# Altium PCB EW-02-PCBDesign.PcbDoc
Units mm, origin at the board's own origin, x right, y up, seen from the top; angles counter-clockwise.
Board outline 152.4 x 101.6 mm, 2 copper layers (Top Layer, Bottom Layer); 16 components, 15 nets, 101 pads, 0 vias.
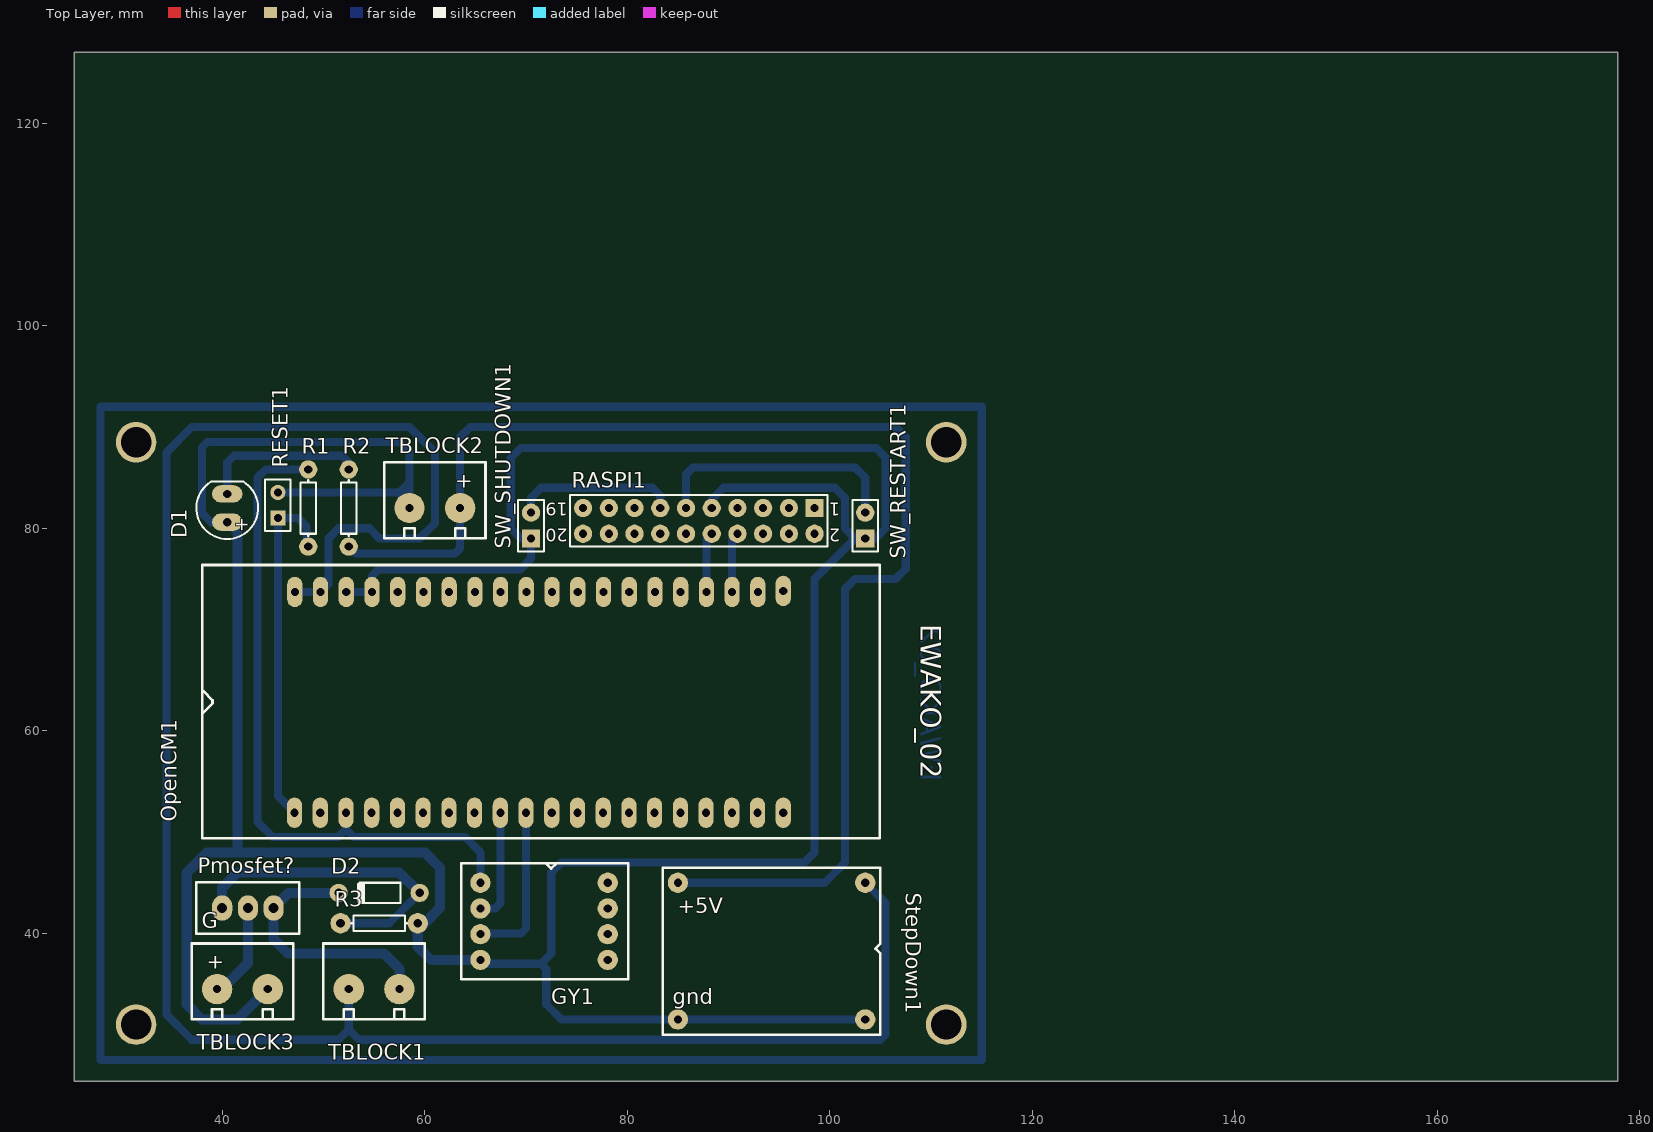
[diagram p0: Top Layer view]
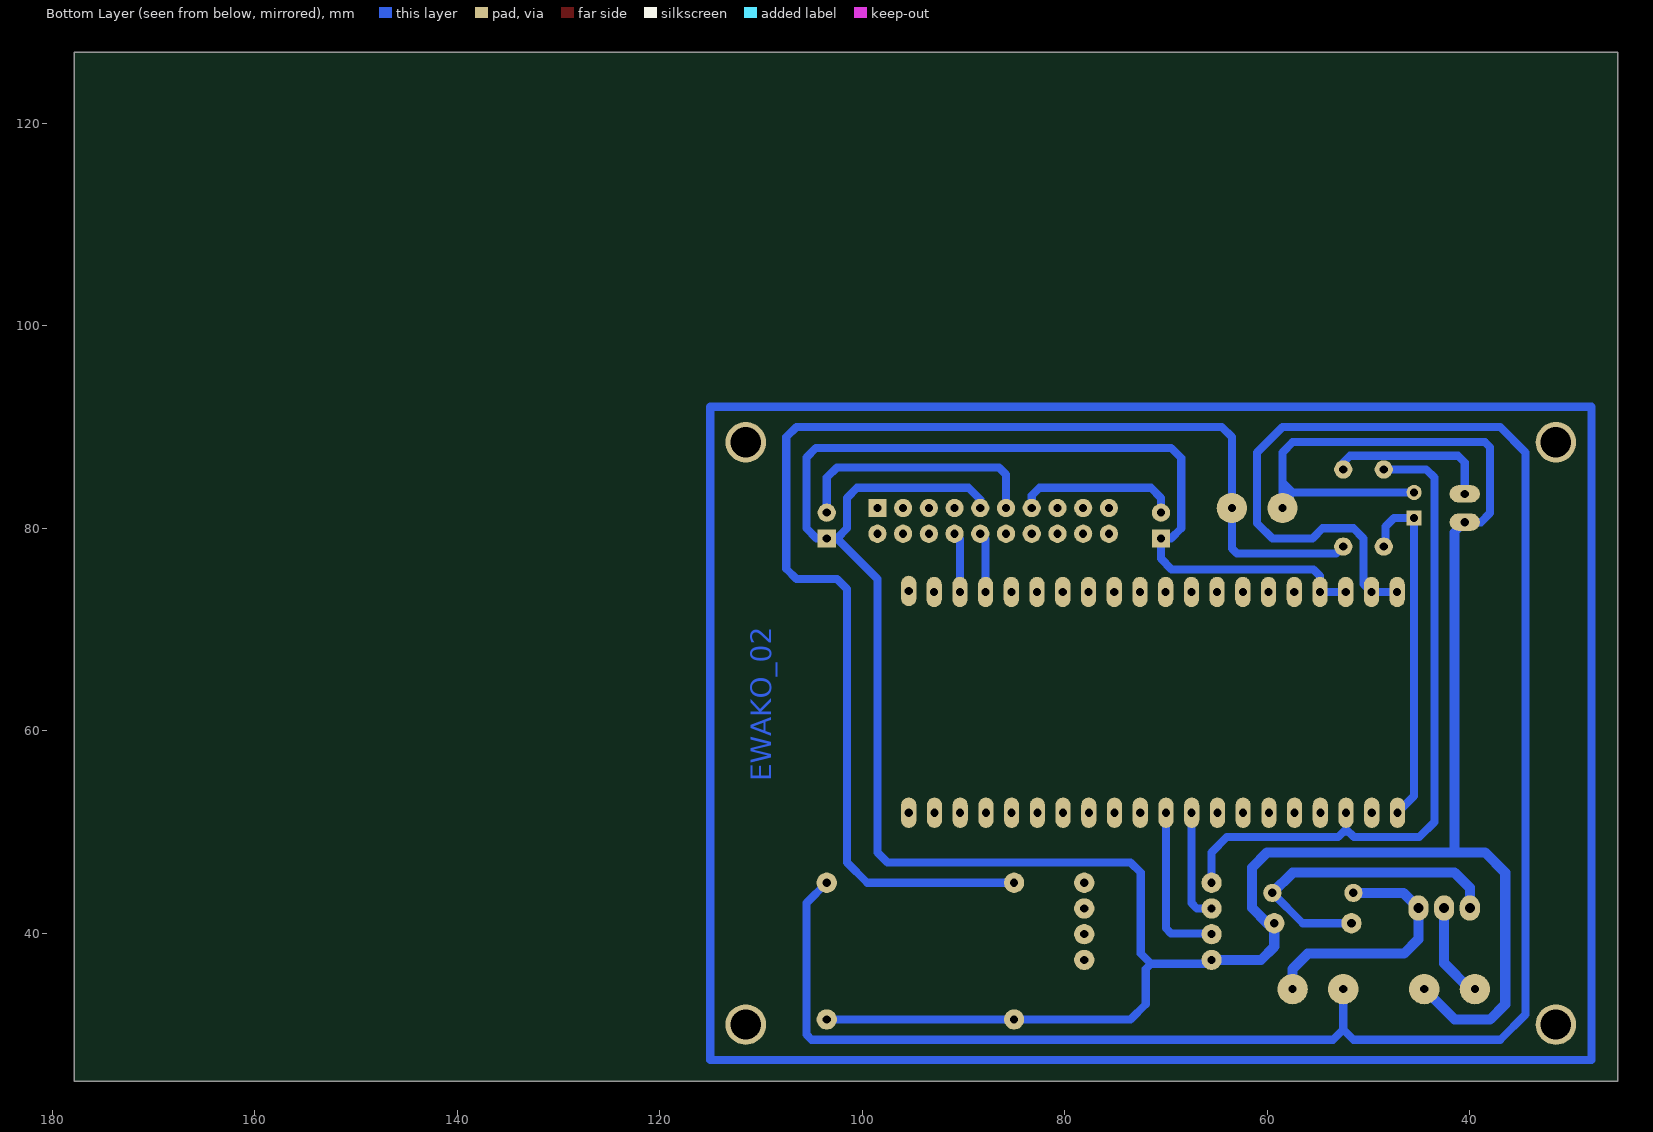
[diagram p1: Bottom Layer view, seen from below]

## Layer stack, top to bottom
Top Solder: solder mask 0.0102, Solder Resist, Dk 3.5
Top Layer: signal copper 0.0356
Dielectric 1: dielectric 0.32, FR-4, Dk 4.8
Bottom Layer: signal copper 0.0356
Bottom Solder: solder mask 0.0102, Solder Resist, Dk 3.5

## Board outline
25.4,25.4 177.8,25.4 177.8,127 25.4,127

## Design rules (kind name [scope] priority, off if disabled: settings)
Clearance [All] p1: gap=0.254
PolygonConnect [All] p1: connectstyle=Relief reliefconductorwidth=0.254 reliefentries=4 polygonreliefangle="90 Angle" airgapwidth=0.254
RoutingVias [All] p1: holewidth=0.711 width=1.27 viastyle="Through Hole" minholewidth=0.711 minwidth=1.27 maxholewidth=0.711 maxwidth=1.27
SolderMaskExpansion [All] p1: expansion=0.102
Width [All] p1: maxlimit=1 minlimit=0.5 preferedwidth=0.8
30 further rules are at their usual default settings.

## Components (designator, comment, footprint, x,y, rotation, side; value= is the part's Value field where it differs from the comment)
D1 "LED1" LED 40.5,82 r270 top
D2 "D Zener" DO-Z 55.5,44 r180 top
GY1 "GY-25" PCBComponent_1#1 65.5,45 r270 top
OpenCM1 "TYPE_A" openCM9.04 47.145,51.913 r0 top
Pmosfet? "FQP47P06" PCBComponent_1#2 40,42.5 r0 top
R1 "Res1" AXIAL-0.3#1 48.5,82 r270 top
R2 "Res1" AXIAL-0.3#1 52.5,82 r90 top
R3 "Res1" AXIAL-0.3#2 55.5,41 r0 top
RASPI1 "Header 10X2" HDR2X10 98.5,82 r180 top
RESET1 "Header 2" HDR1X2#1 45.5,81 r90 top
StepDown1 "DSUN" PCBComponent_1#3 103.5,45 r180 top
SW_RESTART1 "Header 2" HDR1X2#2 103.5,79 r90 top
SW_SHUTDOWN1 "Header 2" HDR1X2#2 70.5,79 r90 top
TBLOCK1 "TB" PCBComponent_1#4 57.5,34.5 r180 top
TBLOCK2 "TB" PCBComponent_1#4 63.5,82 r180 top
TBLOCK3 "TB" PCBComponent_1#4 44.5,34.5 r180 top

## Footprints (in the part's own frame and the unit in brackets; to place one, negate y for a bottom-side part, rotate by r counter-clockwise, add the part's x,y. Pads: shape width x height; smd on the part's side, far side on the other; paste and mask are expansions set on the pad)
AXIAL-0.3#1 [mm] "Axial Device, Thru-Hole; 2 Leads; 0.3 in Pin Spacing"
  round 1.8 hole 0.8: 1(-3.81,0) 2(3.81,0)
  silkscreen extent -2.77,-0.76 2.77,0.76
AXIAL-0.3#2 [mm] "Axial Device, Thru-Hole; 2 Leads; 0.3 in Pin Spacing"
  round 2 hole 0.85: 1(-3.81,0) 2(3.81,0)
  silkscreen extent -2.77,-0.76 2.77,0.76
DO-Z [mm] "Diode, Axial; Body 7 x 2.7 mm (LxDia. max), Lead Dia. 0.53 mm (max)"
  round 1.8 hole 0.83: 1(-4,0) 2(4,0)
  silkscreen extent -2.1,-1 2.2,1
HDR1X2#1 [mm] "Connector; Header; 2 Position"
  rect 1.5x1.5 hole 0.8: 1(0,0)
  round 1.5 hole 0.8: 2(2.54,0)
  silkscreen extent -1.27,-1.27 3.81,1.27
HDR1X2#2 [mm] "Connector; Header; 2 Position"
  rect 1.8x1.8 hole 0.8: 1(0,0)
  round 1.8 hole 0.8: 2(2.54,0)
  silkscreen extent -1.27,-1.27 3.81,1.27
HDR2X10 [mm] "Connector; Header; 10x2 Position"
  rect 1.8x1.8 hole 0.8: 1(0,0)
  round 1.8 hole 0.8: 2(0,2.54) 3(2.54,0) 4(2.54,2.54) 5(5.08,0) 6(5.08,2.54) 7(7.62,0) 8(7.62,2.54) 9(10.16,0) 10(10.16,2.54) 11(12.7,0) 12(12.7,2.54) 13(15.24,0) 14(15.24,2.54) 15(17.78,0) 16(17.78,2.54) 17(20.32,0) 18(20.32,2.54) 19(22.86,0) 20(22.86,2.54)
  silkscreen extent -1.27,-1.27 24.13,3.81
LED [mm]
  oval 1.7x3 hole 0.8: 1(-1.4,0) 2(1.4,0)
  silkscreen extent -2.6,-3.05 3.05,3.05, body extent -2.57,-2.9 2.98,3, height 9.22
openCM9.04 [mm]
  oval 1.5x3 hole 0.8: 1(0,0) 2(2.54,0) 3(5.08,0) 4(7.62,0) 5(10.16,0) 6(12.7,0) 7(15.24,0) 8(17.78,0) 9(20.32,0) 10(22.86,0) 11(25.4,0) 12(27.94,0) 13(30.48,0) 14(33.02,0) 15(35.56,0) 16(38.1,0) 17(40.64,0) 18(43.18,0) 19(45.72,0) 20(48.26,0) 21(48.26,21.9) 22(45.75,21.8) 23(43.21,21.8) 24(40.67,21.8) 25(38.13,21.8) 26(35.59,21.8) 27(33.05,21.8) 28(30.51,21.8) 29(27.97,21.8) 30(25.43,21.8) 31(22.89,21.8) 32(20.35,21.8) 33(17.81,21.8) 34(15.27,21.8) 35(12.73,21.8) 36(10.19,21.8) 37(7.65,21.8) 38(5.11,21.8) 39(2.57,21.8) 40(0.03,21.8)
  silkscreen extent -9.1,-2.54 57.8,24.46
PCBComponent_1#1 [mm]
  round 2 hole 0.8: 1(0,0) 2(2.54,0) 3(5.08,0) 4(7.62,0) 6(7.62,12.573) 7(5.08,12.573) 8(2.54,12.573) 9(0,12.573)
  silkscreen extent -1.91,-1.91 9.53,14.61
PCBComponent_1#2 [mm]
  oval 2x2.5 hole 1: 1(0,0) 2(2.54,0) 3(5.08,0)
  silkscreen extent -2.54,-2.54 7.62,2.54
PCBComponent_1#3 [mm]
  round 2 hole 0.8: 1(0,0) 2(18.5,0) 3(18.5,13.5) 4(0,13.5)
  silkscreen extent -1.5,-1.5 20,15
PCBComponent_1#4 [mm]
  round 3 hole 0.8: 0(0,0) 1(5,0)
  silkscreen extent -2.5,-4.5 7.5,3

## Part data
D1: "Typical RED GaAs LED"
D2: "Zener Diode"
GY1: "GY_25"
OpenCM1: "OpenCM 9.04"
R1 R2 R3: "Resistor"
RASPI1: "Header, 10-Pin, Dual row"
RESET1 SW_RESTART1 SW_SHUTDOWN1: "Header, 2-Pin"
StepDown1: "SD"

## Free pads (board coordinates)
  round 4 hole 3: 2(31.5,31) 2(31.5,88.5) 2(111.5,31) 2(111.5,88.5)

## Nets (pads, with @x,y where several pads share a name; then routed paths per layer and width w, separated by ;. In a path a pad name is that pad's centre, name@x,y a point inside that pad or via, vN(x,y) a via of type N, cw(c..) or ccw(c..) an arc to the next point about the centre after c; other vN are vias at no path point)
+3.3: GY1.1 OpenCM1.3 R1.1 | length 66.2
  Bottom Layer w0.8: R1.1 44.31,85.81 43.5,85 43.5,51 45,49.5 51.45,49.5 52.225,50.275 53,49.5 64,49.5 65.5,48 GY1.1
+12: OpenCM1.39 OpenCM1.40 StepDown1.1 TBLOCK1.1 | length 204.1
  Bottom Layer w0.8: OpenCM1.40 OpenCM1.39 50.5,74.498 50.5,79 51.5,80 54.554,80 55.554,79 59.5,79 61,80.5 61,87.5 58.5,90 37,90 34.5,87.5 34.5,32 37,29.5 51.5,29.5 52.5,30.5 ; TBLOCK1.1 52.5,30.5 ; StepDown1.1 105.5,43 105.5,30 105,29.5 53.5,29.5 52.5,30.5
GND: D1.2 GY1.4 OpenCM1.37 OpenCM1.38 R3.2 RASPI1.9 RESET1.2 StepDown1.3 StepDown1.4 SW_RESTART1.1 SW_SHUTDOWN1.1 TBLOCK2.1 TBLOCK3.0 | length 360.9
  Bottom Layer w0.8: 41.5,79.6 D1.2 38.9,80.6 38,81.5 38,88 38.5,88.5 57.5,88.5 58.5,87.5 58.5,87 58.5,84.54 ; RESET1.2 57.5,83.54 ; OpenCM1.38 OpenCM1.37 54.795,75.295 55.446,75.946 69.446,75.946 70.5,77 SW_SHUTDOWN1.1 69.5,79 68.5,80 68.5,86.946 69.5,87.946 104.554,87.946 105.5,87 105.5,80 104.5,79 SW_RESTART1.1 102.5,79 ; TBLOCK2.1 TBLOCK2.1@58.5,82.54 ; TBLOCK2.1@58.77,82.27 TBLOCK2.1@58.5,82.54 ; GY1.4 65.88,37 71.5,37 ; RASPI1.9 88.34,82.84 89.5,84 100.5,84 101.5,83 101.5,80 102.5,79 ; StepDown1.4 StepDown1.3 73.5,31.5 72,33 72,36.5 71.5,37 ; 57.5,83.54 TBLOCK2.1@58.5,82.54 ; 57.5,83.54 58.5,84.54 ; TBLOCK2.1@58.5,82.54 58.5,84.54 ; 71.5,37 72.5,38 72.5,46 73.5,47 97.5,47 98.5,48 98.5,75 102.5,79
  Bottom Layer w1: 41.5,79.6 41.5,48 ; TBLOCK3.0@45,35 TBLOCK3.0 41.5,31.5 38,31.5 36.5,33 36.5,46 38.5,48 41.5,48 ; GY1.4 60.62,37.38 59.31,38.69 R3.2 60,41 61.5,42.5 61.5,46.5 60,48 41.5,48
NetD1_1: D1.1 R2.2 | length 16.3
  Bottom Layer w0.8: D1.1 40.5,86.5 41.164,87.164 51.836,87.164 52.5,86.5 R2.2
NetD2_1: D2.1 Pmosfet?.1 R3.1 | length 32
  Bottom Layer w0.8: R3.1 56.5,41 D2.1
  Bottom Layer w1: Pmosfet?.1 40,44.5 41.5,46 57.5,46 D2.1
NetD2_2: D2.2 Pmosfet?.3 TBLOCK1.0 | length 25.8
  Bottom Layer w1: D2.2 46.58,44 Pmosfet?.3 45.08,39.42 46.5,38 56,38 57.5,36.5 TBLOCK1.0
NetGY1_2: GY1.2 OpenCM1.9 | length 11.2
  Bottom Layer w0.8: GY1.2 66.96,42.46 67.5,43 67.5,51.878 OpenCM1.9
NetGY1_3: GY1.3 OpenCM1.10 | length 16.2
  Bottom Layer w0.8: GY1.3 65.58,40 69.5,40 70.005,40.505 OpenCM1.10
NetOpenCM1_1: OpenCM1.1 R1.2 RESET1.1 | length 35.1
  Bottom Layer w0.8: OpenCM1.1 45.5,53.558 RESET1.1 47.5,81 48.31,80.19 48.31,78.19 R1.2
NetOpenCM1_23: OpenCM1.23 RASPI1.8 | length 6
  Bottom Layer w0.8: OpenCM1.23 90.355,78.935 RASPI1.8
NetOpenCM1_24: OpenCM1.24 RASPI1.10 | length 6
  Bottom Layer w0.8: OpenCM1.24 87.815,78.935 RASPI1.10
NetPmosfet?_2: Pmosfet?.2 TBLOCK3.1 | length 9.6
  Bottom Layer w1: TBLOCK3.1 40,34.5 42.54,37.04 Pmosfet?.2
NetR2_1: R2.1 StepDown1.2 TBLOCK2.0 | length 131.5
  Bottom Layer w0.8: R2.1 53.19,77.5 63,77.5 63.5,78 63.5,89 64.5,90 106.5,90 107.5,89 107.5,76 106.5,75 102.5,75 101.5,74 101.5,47 99.5,45 StepDown1.2
RESTART: RASPI1.11 SW_RESTART1.2 | length 25.2
  Bottom Layer w0.8: RASPI1.11 85.8,85.3 86.5,86 100.5,86 102.5,86 103.5,85 SW_RESTART1.2
SHUTDOWN: RASPI1.13 SW_SHUTDOWN1.2 | length 16.2
  Bottom Layer w0.8: SW_SHUTDOWN1.2 70.5,83 71.5,84 82.5,84 83.26,83.24 RASPI1.13
pads on no net: GY1.6 GY1.7 GY1.8 GY1.9 OpenCM1.2 OpenCM1.4 OpenCM1.5 OpenCM1.6 OpenCM1.7 OpenCM1.8 OpenCM1.11 OpenCM1.12 OpenCM1.13 OpenCM1.14 OpenCM1.15 OpenCM1.16 OpenCM1.17 OpenCM1.18 OpenCM1.19 OpenCM1.20 OpenCM1.21 OpenCM1.22 OpenCM1.25 OpenCM1.26 OpenCM1.27 OpenCM1.28 OpenCM1.29 OpenCM1.30 OpenCM1.31 OpenCM1.32 OpenCM1.33 OpenCM1.34 OpenCM1.35 OpenCM1.36 RASPI1.1 RASPI1.2 RASPI1.3 RASPI1.4 RASPI1.5 RASPI1.6 RASPI1.7 RASPI1.12 RASPI1.14 RASPI1.15 RASPI1.16 RASPI1.17 RASPI1.18 RASPI1.19 RASPI1.20
copper on no net: | length 303.5
  Bottom Layer w0.8: 28,90.5 28,92 115,92 115,27.5 114,27.5 28,27.5 28,91

## Other copper
Bottom Layer:
  text "EWAKO_02" at 109,55 h2.03 r270

## Silkscreen, mask and mechanical layers (free items; w line width, h text height)
Top Overlay:
  text "+" at 63,84 h1.52
  text "EWAKO_02" at 109,70.5 h2.03 r270
  text "+5V" at 85,42 h1.52
  text "G" at 38,40.5 h1.52
  text "+" at 38.5,36.5 h1.52
  text "gnd" at 84.5,33 h1.52

## Text inside footprints (layer, text, board x,y; h text height)
D1: Top Overlay "+" at 41.4,81.1 h1.3 r270
RASPI1: Top Overlay "2" at 101.04,79.968 h1.27 r180; Top Overlay "1" at 101.04,82.508 h1.27 r180; Top Overlay "19" at 74.116,82.508 h1.27 r180; Top Overlay "20" at 74.116,79.968 h1.27 r180